# EAGLE board lcd-layout (EAGLE 6.6.0)
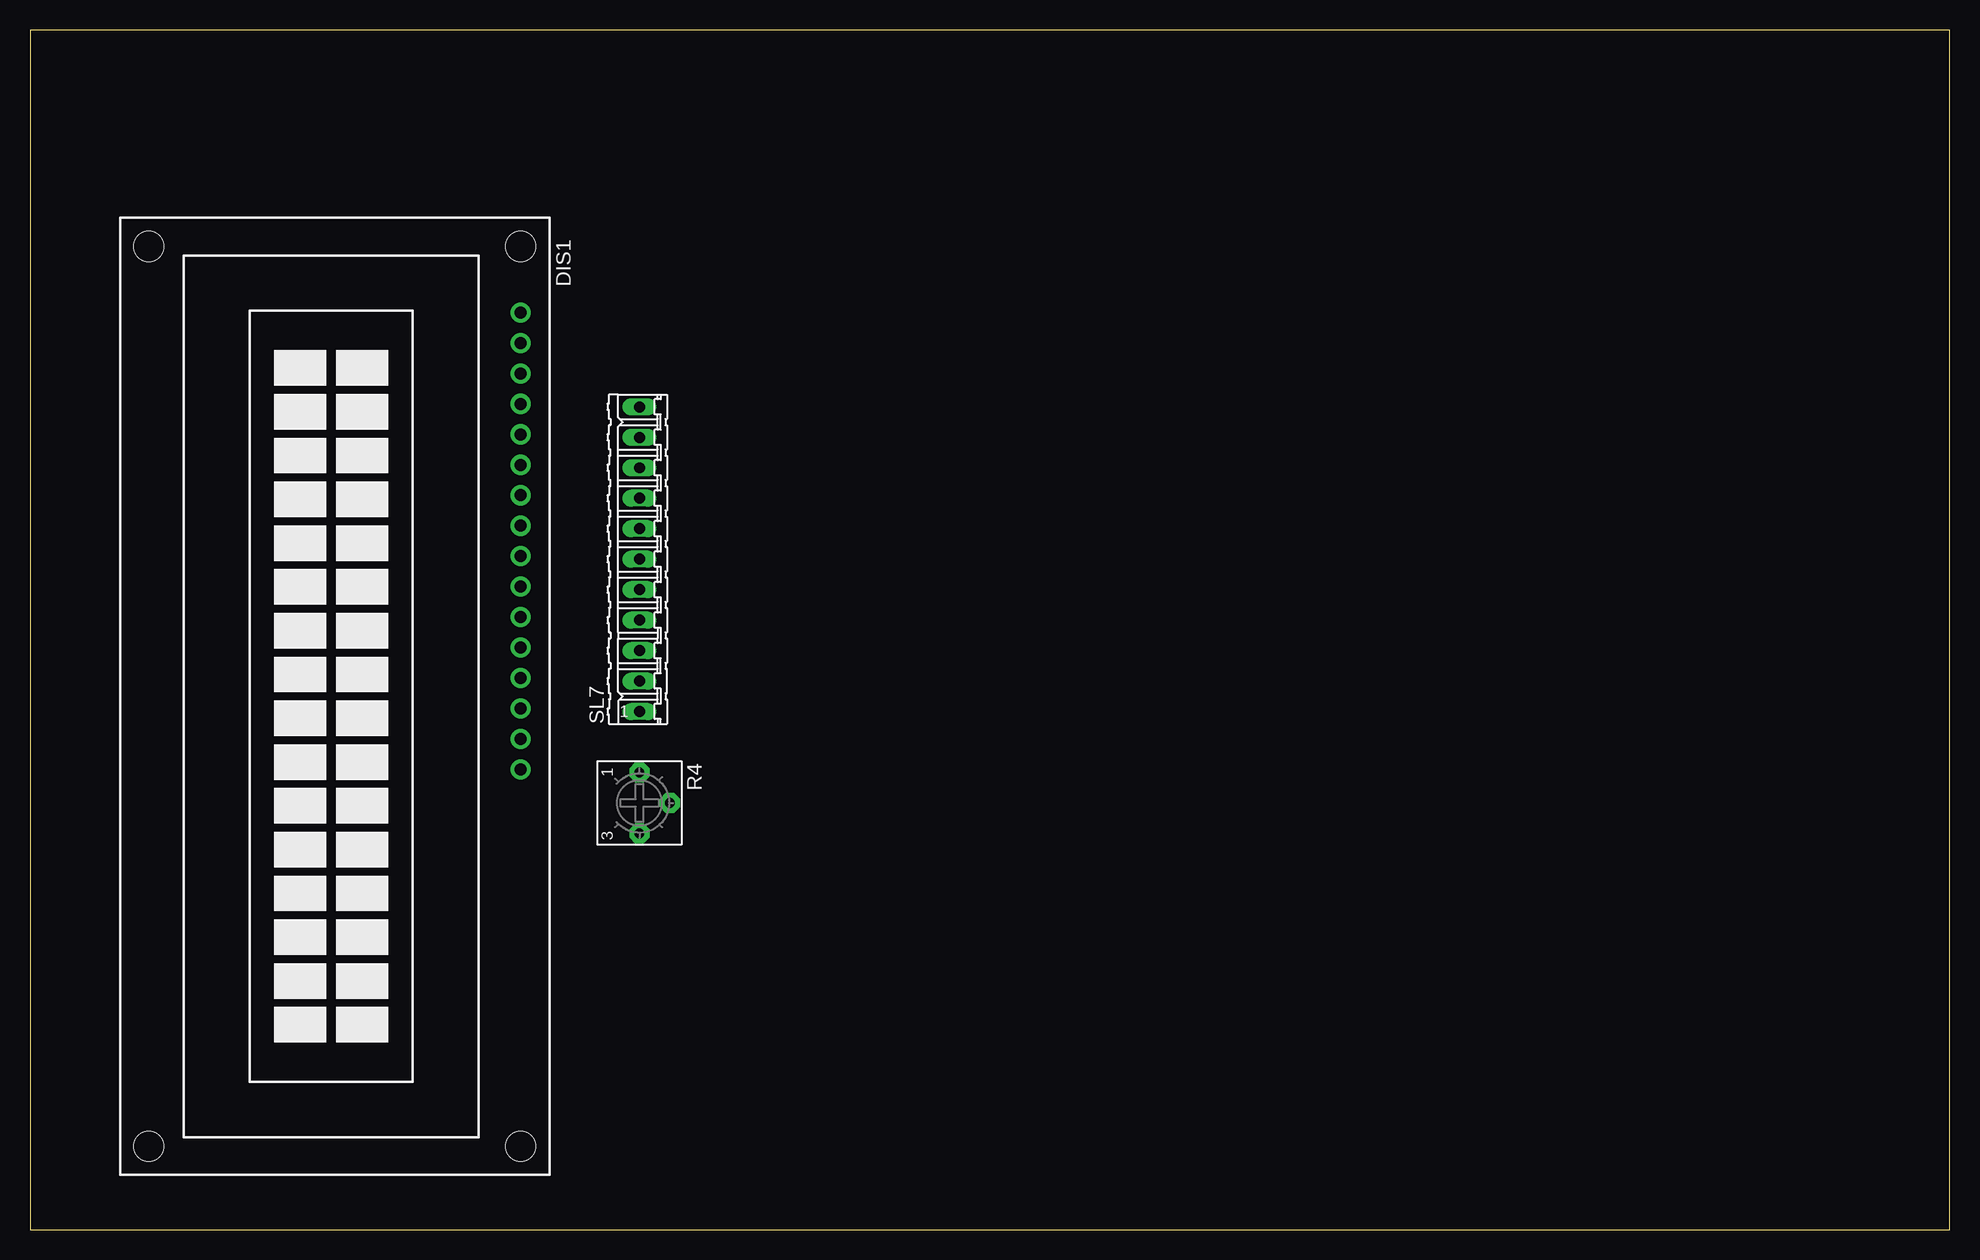
[diagram p0: board, top side]
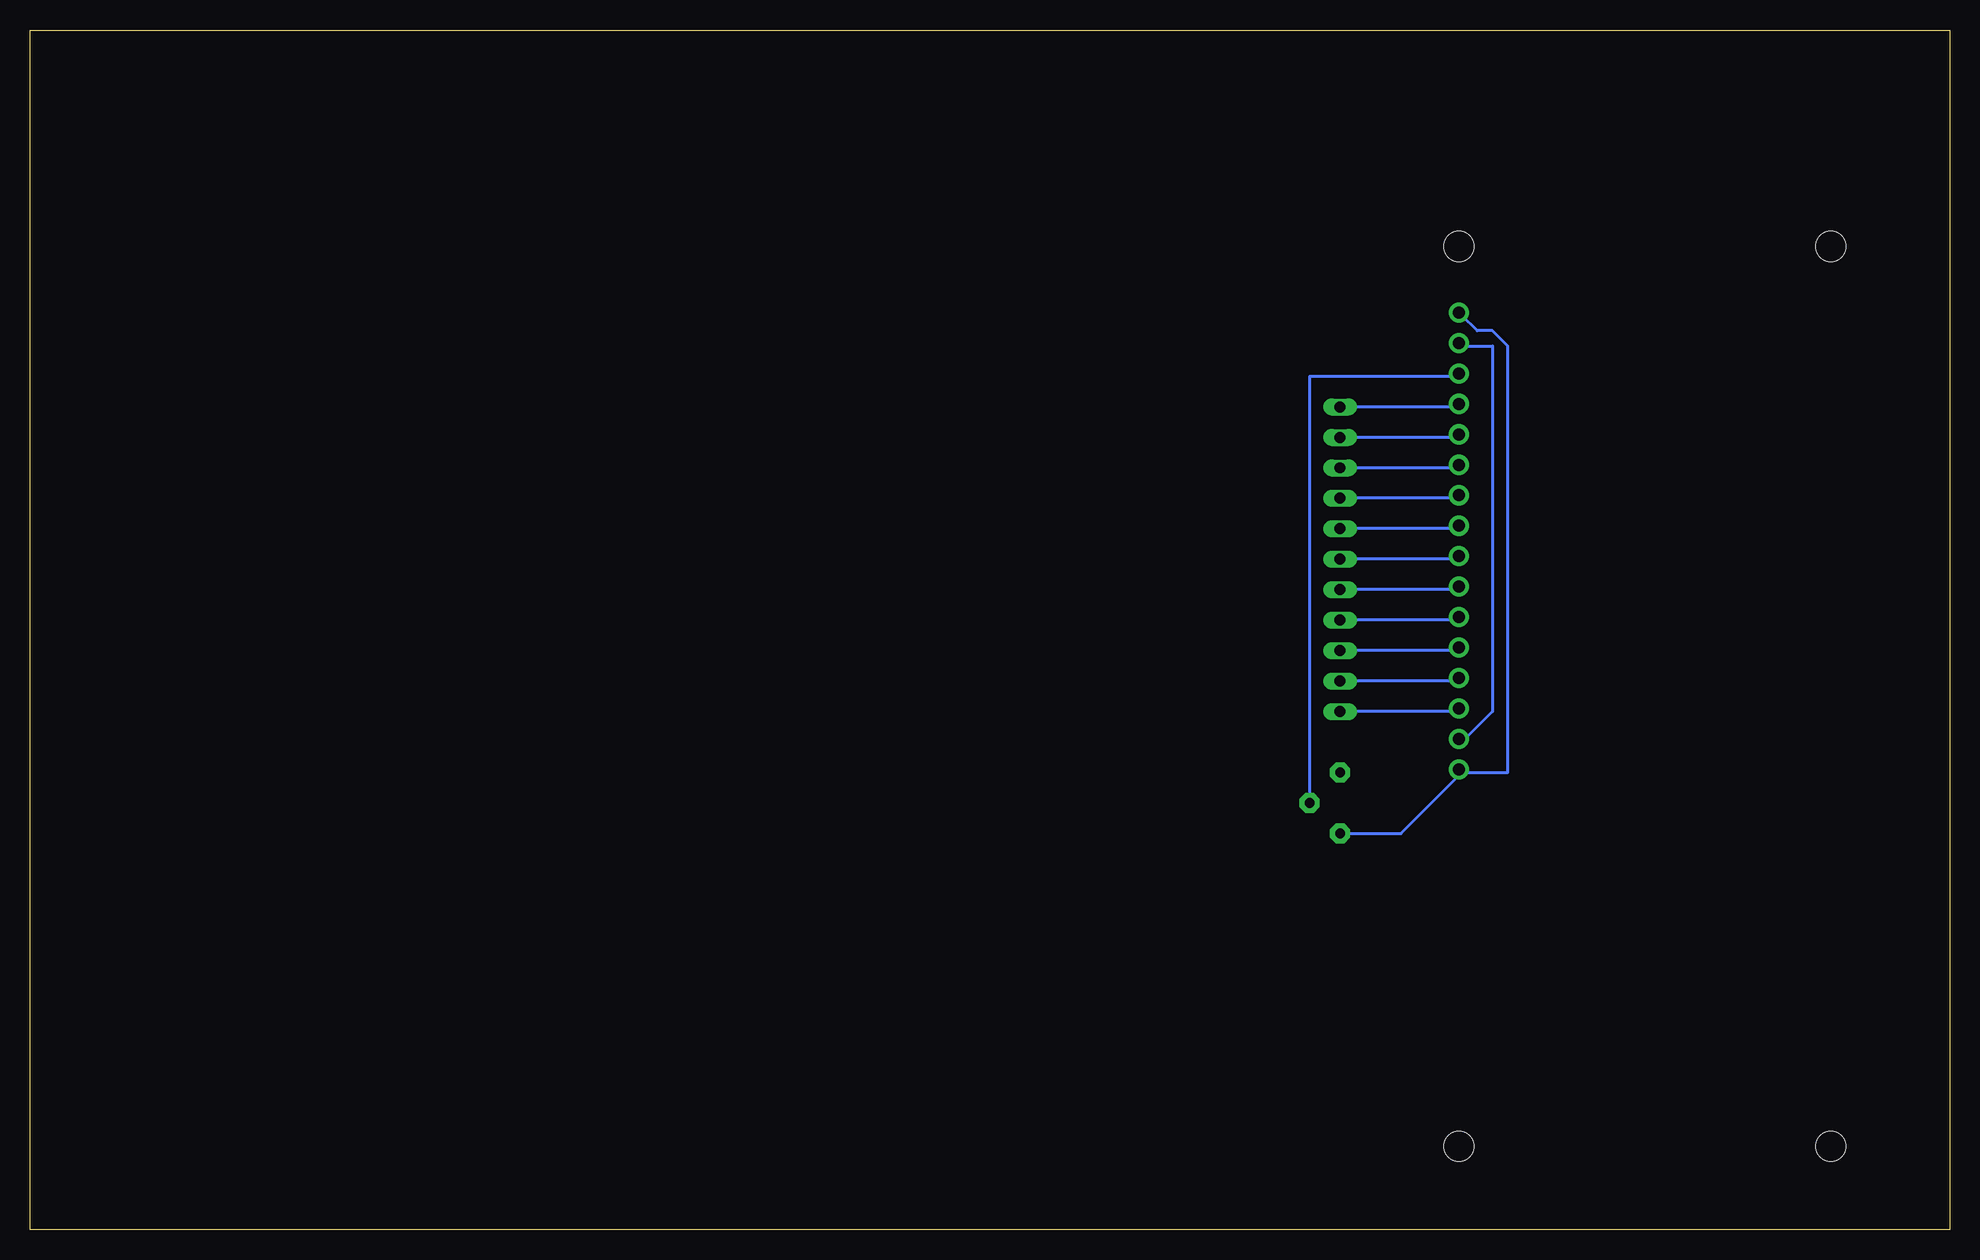
[diagram p1: board, bottom side, seen from below]

Size 160 x 100 mm. Coordinates in mm from the lower left corner, seen from the top.
Outline: 0,0 160,0 160,100 0,100 0,0
Copper layers (1*16): Top 0.035mm / dielectric 1.5mm / Bottom 0.035mm
Design rules "default": minimum track width 10mil, minimum drill 24mil, track to track 8mil, track to pad 8mil, pad to pad 8mil, via to via 8mil, smd to smd 8mil, copper to edge 40mil, drill to drill 8mil, minimum pad ring 10mil, minimum via ring 8mil, stop-mask expansion 4mil, vias tented up to drill 0mil, thermal gap 10mil

## Footprints (pad centres in the part's own frame; a part is rotated, then mirrored left to right if it is on the bottom)
TUXGR_16X2_R2 = drill 1 pad 1.676: 1 -32,15.5; 2 -29.46,15.5; 3 -26.92,15.5; 4 -24.38,15.5; 5 -21.84,15.5; 6 -19.3,15.5; 7 -16.76,15.5; 8 -14.22,15.5; 9 -11.68,15.5; 10 -9.14,15.5; 11 -6.6,15.5; 12 -4.06,15.5; 13 -1.52,15.5; 14 1.02,15.5; 15 3.56,15.5; 16 6.1,15.5 | hole 2.5: -37.5,-15.5; 37.5,-15.5; -37.5,15.5; 37.5,15.5
3362P = drill 0.813 pad 1.676 octagon: 1 -2.54,0; 2 0,2.54; 3 2.54,0
11P = drill 0.914 long: 1 -12.7,0; 2 -10.16,0; 3 -7.62,0; 4 -5.08,0; 5 -2.54,0; 6 0,0; 7 2.54,0; 8 5.08,0; 9 7.62,0; 10 10.16,0; 11 12.7,0

## Placement (x,y rotation side)
DIS1  TUXGR_16X2_R2  [TUXGR_16X2_R2]  25.4,44.45 270 top
R4  [3362P]  50.8,35.56 270 top
SL7  [11P]  50.8,55.88 90 top

## Library data of the parts
DIS1 = display-lcd; OC_FARNELL: unknown; OC_NEWARK: unknown
R4 = bourns
SL7 = con-amp-quick; OC_FARNELL: unknown; OC_NEWARK: unknown

## Nets
GND: DIS1.1 DIS1.16 R4.3
N$53: DIS1.14 SL7.1
N$54: DIS1.13 SL7.2
N$55: DIS1.12 SL7.3
N$56: DIS1.11 SL7.4
N$57: DIS1.10 SL7.5
N$58: DIS1.9 SL7.6
N$59: DIS1.8 SL7.7
N$60: DIS1.7 SL7.8
N$61: DIS1.6 SL7.9
N$62: DIS1.5 SL7.10
N$63: DIS1.4 SL7.11
N$64: R4.1
N$127: DIS1.3 R4.2
VCC: DIS1.2 DIS1.15

## Tracks (layer width: path | path; a pad name or v marks a point on that pad's centre or on a via)
GND
  Bottom 0.254: 40.64,38.1 45.72,33.02 R4.3 | 40.64,38.1 36.83,38.1 36.83,73.66 38.1,74.93 39.37,74.93 40.64,76.2 DIS1.1 | 40.64,38.1 DIS1.16
N$53
  Bottom 0.254: SL7.1 40.64,43.18 DIS1.14
N$54
  Bottom 0.254: SL7.2 40.64,45.72 DIS1.13
N$55
  Bottom 0.254: SL7.3 40.64,48.26 DIS1.12
N$56
  Bottom 0.254: SL7.4 40.64,50.8 DIS1.11
N$57
  Bottom 0.254: SL7.5 40.64,53.34 DIS1.10
N$58
  Bottom 0.254: SL7.6 40.64,55.88 DIS1.9
N$59
  Bottom 0.254: SL7.7 40.64,58.42 DIS1.8
N$60
  Bottom 0.254: SL7.8 40.64,60.96 DIS1.7
N$61
  Bottom 0.254: SL7.9 40.64,63.5 DIS1.6
N$62
  Bottom 0.254: SL7.10 40.64,66.04 DIS1.5
N$63
  Bottom 0.254: SL7.11 40.64,68.58 DIS1.4
N$127
  Bottom 0.254: R4.2 53.34,71.12 40.64,71.12 DIS1.3
VCC
  Bottom 0.254: DIS1.15 40.64,40.64 38.1,43.18 38.1,73.66 40.64,73.66 DIS1.2